# Altium PCB MB1367.PcbDoc (part 6 of 6)
Units mm, origin at the board's own origin, x right, y up, seen from the top; angles counter-clockwise.
Board outline 70 x 82.5 mm, 4 copper layers (Top Layer, Signal Layer 1, Signal Layer 2, Bottom Layer), stack 1.614 mm thick; 187 components, 143 nets, 802 pads, 920 vias.
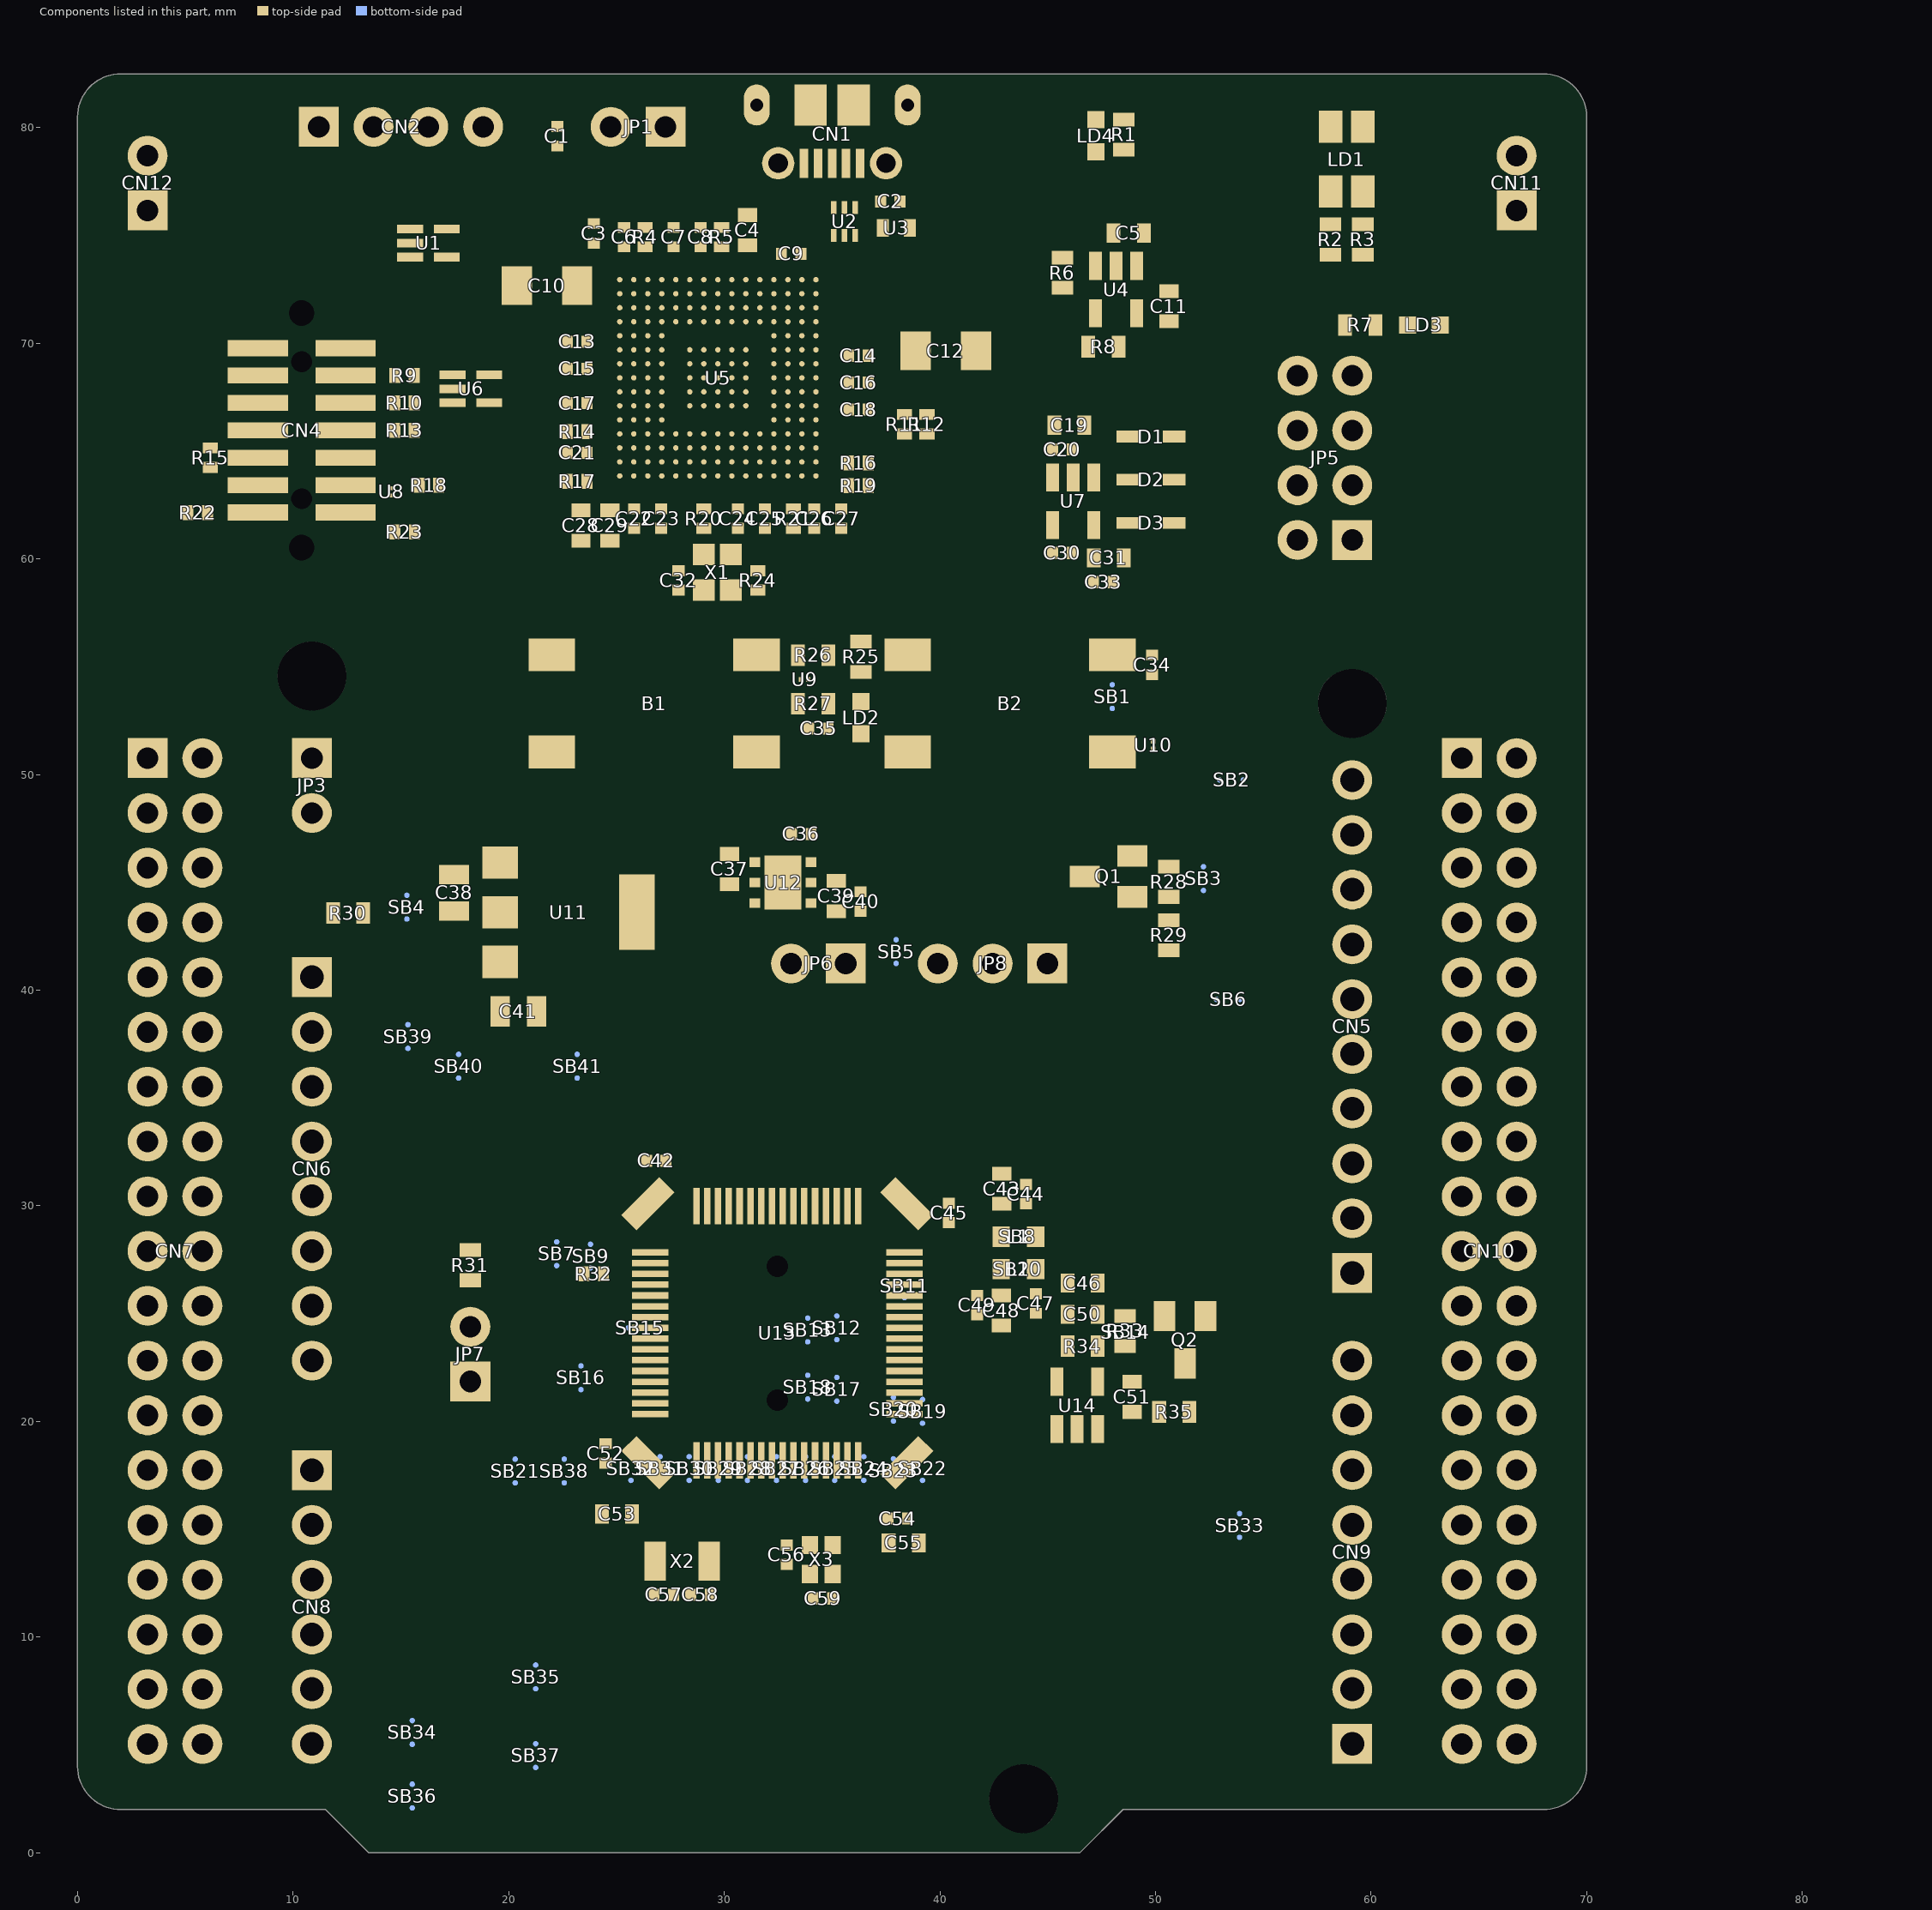
[diagram p7: the components of this part, seen from the top]

## Silkscreen, mask and mechanical layers (free items; w line width, h text height) (continued)
Drill Drawing:
  drawing of 401 lines, arcs and shapes, not listed
  text "« THE COMPONENTS WITH PLATED THROUGH HOLE (PTH) MAY BE WELDED (CABLED) IN \"PIN-IN-PASTE\" MODE (IF NECESSARY) »" at 16.925,136.875 h3.5
  text "PCB SPECIFICATIONS :" at 0.67,130.815 h3
  text "**Plating type :" at 117.72,130.465 h2.5
  text "A.   MATERIAL :" at 0.67,126.815 h3
  text "FR-4" at 39.17,126.815 h3
  text "TG-170" at 55.67,126.815 h3
  text "X  TG-150" at 73.92,126.815 h3
  text "TG-140" at 89.92,126.815 h3
  text "lead Gold" at 124.445,125.99 h2.5
  text "B.   MATERIAL FAMILY :" at 0.67,123.815 h3
  text "N/A" at 39.17,123.815 h3
  text "C.   SOLDERMASK COLOR :" at 0.67,120.815 h3
  text "GREEN" at 39.17,120.815 h3
  text "X  WHITE" at 55.67,120.815 h3
  text "RED" at 73.92,120.815 h3
  text "BLACK" at 89.92,120.815 h3
  text "D.   SILKSCREEN COLOR :" at 0.67,117.815 h3
  text "WHITE" at 39.17,117.815 h3
  text "YELLOW" at 55.67,117.815 h3
  text "BLACK" at 73.92,117.815 h3
  text "X  Blue ink PANTONE 2955" at 89.92,117.815 h3
  text "E.   SURFACE FINISH :" at 0.67,114.815 h3
  text "X  ENIG" at 39.17,114.815 h3
  text "IMMERSION SILVER" at 55.67,114.815 h3
  text "IMMERSION TIN" at 89.92,114.815 h3
  text "HASL" at 39.17,111.815 h3
  text "HASL (PB-FREE)" at 55.67,111.815 h3
  text "GOLDEN FINGER" at 89.92,111.815 h3
  text "F.   IMPEDANCE CONTROL :" at 0.67,108.815 h3
  text "NO" at 39.17,108.815 h3
  text "X  YES  (SEE IMPEDANCE TABLE FOR DETAIL INFORMATION)" at 55.67,108.815 h3
  text "G.   THROUGH VIA :" at 0.67,105.815 h3
  text "PLUG THE VIAS WHICH ARE COVERED WITH SOLDERMASK ONE OR TWO SIDE." at 39.17,105.815 h3
  text "PLUG MATERIAL :" at 39.17,102.815 h3
  text "X  SOLDERMASK" at 64.67,102.815 h3
  text "NON-CONDUCTIVE EPOXY." at 89.92,102.815 h3
  text "H.   STACK-UP :" at 0.67,99.815 h3
  text "SEE LAYER STACK-UP SEQUENCE FOR OVERALL THICKNESS." at 39.17,99.815 h3
  text "Layer" at 79.198,93.05 h2
  text "Name" at 87.572,93.05 h2
  text "Material" at 103.769,93.05 h2
  text "Thickness" at 118.323,93.05 h2
  text "Constant" at 130.278,93.05 h2
  text "Board Layer Stack" at 141.342,93.05 h2
  text "Top Overlay" at 87.572,89.05 h2
  text "PCB : TYPE 3" at 166.351,87.363 h3
  text "Top Solder" at 87.572,85.05 h2
  text "Solder Resist" at 103.769,85.05 h2
  text "0.015mm" at 118.323,85.05 h2
  text "3.5" at 130.278,85.05 h2
  text "ASPECT-RATIO, AXE Z :" at 166.351,81.863 h3
  text "1" at 79.198,81.05 h2
  text "Top Layer" at 87.572,81.05 h2
  text "0.042mm" at 118.323,81.05 h2
  text "Dielectric 1" at 87.572,77.05 h2
  text "PP-IT-180A" at 103.769,77.05 h2
  text "0.106mm" at 118.323,77.05 h2
  text "4.2" at 130.278,77.05 h2
  text "6:1 to 8:1 / LEVEL \"B\"" at 166.37,75.115 h3
  text "2" at 79.196,73.05 h2
  text "Signal Layer 1" at 87.572,73.05 h2
  text "0.035mm" at 118.323,73.05 h2
  text "Dielectric 2" at 87.572,69.05 h2
  text "FR4" at 103.769,69.05 h2
  text "1.248mm" at 118.323,69.05 h2
  text "4.2" at 130.278,69.05 h2
  text "MINIMUM PARAMETERS" at 166.595,65.99 h3
  text "3" at 79.198,65.05 h2
  text "Signal Layer 2" at 87.572,65.05 h2
  text "0.035mm" at 118.323,65.05 h2
  text "Dielectric 3" at 87.572,61.05 h2
  text "PP-IT-180A" at 103.769,61.05 h2
  text "0.106mm" at 118.323,61.05 h2
  text "4.2" at 130.278,61.05 h2
  text "DEFAULT" at 166.595,60.49 h3
  text "4" at 79.198,57.05 h2
  text "Bottom Layer" at 87.572,57.05 h2
  text "0.042mm" at 118.323,57.05 h2
  text "TRACKS : 0.120mm           / GAPS : 0.120mm" at 166.595,54.74 h3
  text "Bottom Solder" at 87.572,53.05 h2
  text "Solder Resist" at 103.769,53.05 h2
  text "0.015mm" at 118.323,53.05 h2
  text "3.5" at 130.278,53.05 h2
  text "Bottom Overlay" at 87.572,49.05 h2
  text "Symbol" at 87.771,42.179 h2.4
  text "Count" at 97.17,42.179 h2.4
  text "Hole Size" at 107.801,42.179 h2.4
  text "Plated" at 127.073,42.179 h2.4
  text "Hole Type" at 135.324,42.179 h2.4
  text "Drill Layer Pair" at 147.335,42.179 h2.4
  text "Via/Pad" at 170.115,42.179 h2.4
  text "Hole Length" at 179.958,42.179 h2.4
  text "Routed Path Length" at 198.115,42.179 h2.4
  text "920" at 97.17,38.036 h2
  text "0.200mm (7.87mil)" at 107.801,38.036 h2
  text "PTH" at 127.073,38.036 h2
  text "Round" at 135.324,38.036 h2
  text "Top Layer - Bottom Layer" at 147.335,38.036 h2
  text "Via" at 170.115,38.036 h2
  text "-" at 179.958,38.036 h2
  text "-" at 198.115,38.036 h2
  text "2" at 97.17,33.892 h2
  text "0.600mm (23.62mil)" at 107.801,33.892 h2
  text "PTH" at 127.073,33.892 h2
  text "Slot" at 135.324,33.892 h2
  text "Top Layer - Bottom Layer" at 147.335,33.892 h2
  text "Pad" at 170.115,33.892 h2
  text "1.300mm (51.18mil)" at 179.958,33.892 h2
  text "0.700mm (27.56mil)" at 198.115,33.892 h2
  text "2" at 97.17,29.749 h2
  text "0.900mm (35.43mil)" at 107.801,29.749 h2
  text "PTH" at 127.073,29.749 h2
  text "Round" at 135.324,29.749 h2
  text "Top Layer - Bottom Layer" at 147.335,29.749 h2
  text "Pad" at 170.115,29.749 h2
  text "-" at 179.958,29.749 h2
  text "-" at 198.115,29.749 h2
  text "2" at 97.17,25.606 h2
  text "0.970mm (38.19mil)" at 107.801,25.606 h2
  text "NPTH" at 127.073,25.606 h2
  text "Round" at 135.324,25.606 h2
  text "Top Layer - Bottom Layer" at 147.335,25.606 h2
  text "Pad" at 170.115,25.606 h2
  text "-" at 179.958,25.606 h2
  text "-" at 198.115,25.606 h2
  text "2" at 97.17,21.463 h2
  text "1.000mm (39.37mil)" at 107.801,21.463 h2
  text "NPTH" at 127.073,21.463 h2
  text "Round" at 135.324,21.463 h2
  text "Top Layer - Bottom Layer" at 147.335,21.463 h2
  text "Pad" at 170.115,21.463 h2
  text "-" at 179.958,21.463 h2
  text "-" at 198.115,21.463 h2
  text "103" at 97.17,17.32 h2
  text "1.000mm (39.37mil)" at 107.801,17.32 h2
  text "PTH" at 127.073,17.32 h2
  text "Round" at 135.324,17.32 h2
  text "Top Layer - Bottom Layer" at 147.335,17.32 h2
  text "Pad" at 170.115,17.32 h2
  text "-" at 179.958,17.32 h2
  text "-" at 198.115,17.32 h2
  text "32" at 97.17,13.177 h2
  text "1.100mm (43.31mil)" at 107.801,13.177 h2
  text "PTH" at 127.073,13.177 h2
  text "Round" at 135.324,13.177 h2
  text "Top Layer - Bottom Layer" at 147.335,13.177 h2
  text "Pad" at 170.115,13.177 h2
  text "-" at 179.958,13.177 h2
  text "-" at 198.115,13.177 h2
  text "2" at 97.17,9.034 h2
  text "1.190mm (46.85mil)" at 107.801,9.034 h2
  text "NPTH" at 127.073,9.034 h2
  text "Round" at 135.324,9.034 h2
  text "Top Layer - Bottom Layer" at 147.335,9.034 h2
  text "Pad" at 170.115,9.034 h2
  text "-" at 179.958,9.034 h2
  text "-" at 198.115,9.034 h2
  text "3" at 97.17,4.891 h2
  text "3.200mm (125.98mil)" at 107.801,4.891 h2
  text "NPTH" at 127.073,4.891 h2
  text "Round" at 135.324,4.891 h2
  text "Top Layer - Bottom Layer" at 147.335,4.891 h2
  text "Pad" at 170.115,4.891 h2
  text "-" at 179.958,4.891 h2
  text "-" at 198.115,4.891 h2
  text "1068 Total" at 97.17,0.748 h2
  text "Slot definitions :" at 87.771,-2.152 h2
  text "Routed Path Length" at 101.424,-2.152 h2
  text "= Calculated from tool start centre position to tool end centre position." at 118.338,-2.152 h2
  text "Hole Length" at 101.424,-3.81 h2
  text "= Routed Path Length + Tool Size = Slot length as defined in the PCB layout" at 112.059,-3.81 h2
  text "IMPEDANCE TABLE" at 100.045,-10.385 h3
  text "LAYER" at 104.295,-15.385 h3
  text "TRACE" at 120.545,-15.385 h3
  text "SPACING" at 131.045,-15.385 h3
  text "IMPEDANCE" at 144.545,-15.385 h3
  text "IMPEDANCE" at 161.545,-15.385 h3
  text "TOL." at 180.295,-15.385 h3
  text "(mm)" at 134.37,-17.86 h2.5
  text "(mm)" at 122.545,-17.91 h2.5
  text "(Single ended)" at 145.045,-18.135 h2.5
  text "(Differentiel)" at 162.795,-18.135 h2.5
  text "0.160" at 121.52,-21.86 h3
  text "NA" at 150.145,-21.86 h3
  text "0.226" at 133.545,-21.885 h3
  text "90 ohm" at 164.795,-21.885 h3
  text "+/- 10%" at 178.795,-21.885 h3
  text "TOP" at 105.445,-21.91 h3

## Dimensions
2,82.5 to 13.5,0 on M2-Board Dimensions
0,80.5 to 70,80.5 on M2-Board Dimensions

## Text inside footprints (layer, text, board x,y; h text height)
CN1: Top Overlay "1" at 39.25,77.9 h1.5; M14-Top Assembly "5" at 34,78.95 h1.5 r180; M14-Top Assembly "1" at 36.55,78.95 h1.5 r180; M7-Top Info "PCB" at 41.25,83.225 h1 r180; M7-Top Info "EDGE" at 30.65,83.2 h1 r180
CN2: Top Overlay "1" at 9.35,79.54 h1.5; M14-Top Assembly "4" at 18.425,79.59 h1.5; M14-Top Assembly "1" at 11,79.54 h1.5
CN4: Top Overlay "1" at 6.87,70.69 h1.5 r270; Top Overlay "2" at 12.92,70.99 h1.5 r270; Top Overlay "13" at 6.895,61.565 h1.5 r270; Top Overlay "14" at 12.945,61.565 h1.5 r270; M14-Top Assembly "1" at 7.195,69.915 h1 r270; M14-Top Assembly "13" at 7.245,62.615 h1 r270; M14-Top Assembly "14" at 12.895,62.59 h1 r270; M14-Top Assembly "2" at 12.92,70.015 h1 r270
CN5: Top Overlay "1" at 60.6,26.4 h1.5; M14-Top Assembly "1" at 59.63,26.694 h1.5 r90; M14-Top Assembly "10" at 59.63,49.014 h1.5 r90
CN6: Top Overlay "1" at 9.125,40.075 h1.5; M14-Top Assembly "8" at 10.345,23.16 h1.5 r270; M14-Top Assembly "1" at 10.37,40.79 h1.5 r270
CN7: Top Overlay "2" at 7.27,50.275 h1.5; Top Overlay "1" at 1.425,50.175 h1.5; M14-Top Assembly "37" at 2.77,5.7 h1.5 r270; M14-Top Assembly "38" at 5.345,5.7 h1.5 r270; M14-Top Assembly "1" at 2.795,51.025 h1.5 r270; M14-Top Assembly "2" at 5.295,51.125 h1.5 r270
CN8: Top Overlay "1" at 9.125,17.3 h1.5; M14-Top Assembly "6" at 10.345,5.365 h1.5 r270; M14-Top Assembly "1" at 10.37,17.93 h1.5 r270
CN9: Top Overlay "1" at 60.55,4.525 h1.5; M14-Top Assembly "8" at 59.655,22.48 h1.5 r90; M14-Top Assembly "1" at 59.63,4.85 h1.5 r90
CN10: Top Overlay "2" at 68.2,50.4 h1.5; Top Overlay "1" at 62.35,50.225 h1.5; M14-Top Assembly "37" at 63.73,5.7 h1.5 r270; M14-Top Assembly "38" at 66.305,5.7 h1.5 r270; M14-Top Assembly "1" at 63.755,51.025 h1.5 r270; M14-Top Assembly "2" at 66.255,51.125 h1.5 r270
CN11: Top Overlay "1" at 68.375,75.65 h1.5; M14-Top Assembly "1" at 67.275,75.905 h1.5 r90
CN12: Top Overlay "1" at 1.3,75.625 h1.5; M14-Top Assembly "1" at 3.775,75.905 h1.5 r90
D1: M14-Top Assembly "K" at 48.775,66.075 h1.2 r180
D2: M14-Top Assembly "K" at 48.775,64.075 h1.2 r180
D3: M14-Top Assembly "K" at 48.775,62.075 h1.2 r180
HW105: Top Overlay "COMPLIANT" at 83.592,0.52 h1.5 r90; Top Overlay "RoHS" at 82.322,0.901 h3 r90
JP1: Top Overlay "1" at 28.775,79.575 h1.5; M14-Top Assembly "1" at 27.525,80.565 h1.5 r180
JP3: Top Overlay "1" at 8.925,50.225 h1.5; M14-Top Assembly "1" at 10.345,51.015 h1.5 r270
JP5: Top Overlay "1" at 60.575,59.575 h1.5; Top Overlay "2" at 54.475,59.55 h1.5; M14-Top Assembly "2" at 57.085,60.515 h1.5 r90; M14-Top Assembly "1" at 59.635,60.69 h1.5 r90; M14-Top Assembly "7" at 59.66,68.185 h1.5 r90; M14-Top Assembly "8" at 57.11,68.185 h1.5 r90
JP6: Top Overlay "1" at 37.15,40.7 h1.5; M14-Top Assembly "1" at 35.89,41.76 h1.5 r180
JP7: Top Overlay "1" at 19.725,21.325 h1.5; M14-Top Assembly "1" at 18.745,21.595 h1.5 r90
JP8: Top Overlay "1" at 46.475,40.8 h1.5; M14-Top Assembly "1" at 45.175,41.735 h1.5 r180
LD1: Top Overlay "R" at 59.92,79.04 h1.5 r180; Top Overlay "G" at 58.47,79.04 h1.5 r180; M14-Top Assembly "G" at 58.47,79.065 h1.5 r180; M14-Top Assembly "C2" at 58.945,77.615 h0.75 r180; M14-Top Assembly "C1" at 60.32,80.465 h0.75 r180; M14-Top Assembly "R" at 59.92,79.065 h1.5 r180; M14-Top Assembly "A2" at 58.895,80.44 h0.75 r180; M14-Top Assembly "A1" at 60.37,77.59 h0.75 r180
LD2: M14-Top Assembly "K" at 36.145,51.84 h0.75 r270
LD3: M14-Top Assembly "K" at 63.25,70.65 h0.75
LD4: M14-Top Assembly "K" at 46.983,78.73 h0.75 r270
U2: Top Overlay "1" at 34.275,74.55 h1.3; M14-Top Assembly "6" at 34.975,76.075 h0.5; M14-Top Assembly "5" at 35.475,76.075 h0.5; M14-Top Assembly "4" at 35.965,76.083 h0.5; M14-Top Assembly "3" at 35.975,74.9 h0.5; M14-Top Assembly "2" at 35.475,74.9 h0.5; M14-Top Assembly "1" at 35,74.9 h0.5
U3: M14-Top Assembly "1" at 37.15,74.875 h0.75; M14-Top Assembly "2" at 38.3,74.85 h0.75
U4: Top Overlay "1" at 49.875,73.25 h1.5
U5: M14-Top Assembly "A1" at 25.3,63.5 h0.75 r90
U7: Top Overlay "1" at 47.6,63.8 h1.5
U8: M14-Top Assembly "K" at 14.37,63.765 h0.5 r270
U9: M14-Top Assembly "K" at 33.07,54.24 h0.5
U10: M14-Top Assembly "K" at 50.07,50.715 h0.5 r90
U11: Top Overlay "1" at 19.125,47.2 h1.5 r270; M14-Top Assembly "3" at 19.37,41.665 h1.5 r270; M14-Top Assembly "2" at 19.395,43.965 h1.5 r270; M14-Top Assembly "1" at 19.42,46.115 h1.5 r270; M14-Top Assembly "4" at 25.145,43.94 h1.5 r270
U12: Top Overlay "1" at 30.995,47.015 h1.5 r270
U13: Top Overlay "1" at 28.06,17.315 h1.5; M14-Top Assembly "1" at 28.51,17.19 h1.2; M14-Top Assembly "16" at 35.735,17.215 h1.2; M14-Top Assembly "17" at 39.41,19.815 h1.2 r90; M14-Top Assembly "32" at 39.36,27.29 h1.2 r90; M14-Top Assembly "33" at 36.76,31.015 h1.2 r180; M14-Top Assembly "48" at 29.31,30.99 h1.2 r180; M14-Top Assembly "49" at 25.535,28.415 h1.2 r270; M14-Top Assembly "64" at 25.535,20.915 h1.2 r270
X1: M14-Top Assembly "1" at 30.425,58.5 h0.6 r90; M14-Top Assembly "2" at 30.425,60.05 h0.6 r90; M14-Top Assembly "3" at 29.3,60.05 h0.6 r90; M14-Top Assembly "4" at 29.3,58.45 h0.6 r90
X3: M14-Top Assembly "4" at 34.82,14.34 h0.5 r270; M14-Top Assembly "3" at 34.82,13.065 h0.5 r270; M14-Top Assembly "2" at 33.845,13.065 h0.5 r270; M14-Top Assembly "1" at 33.845,14.315 h0.5 r270